# Altium PCB Hammond 1554H Template.PcbDoc
Units mil, origin at the board's own origin, x right, y up, seen from the top; angles counter-clockwise.
Board outline 6580.35 x 4200 mil, 2 copper layers (Top Layer, Bottom Layer); 45 components, 43 nets, 251 pads, 24 vias.
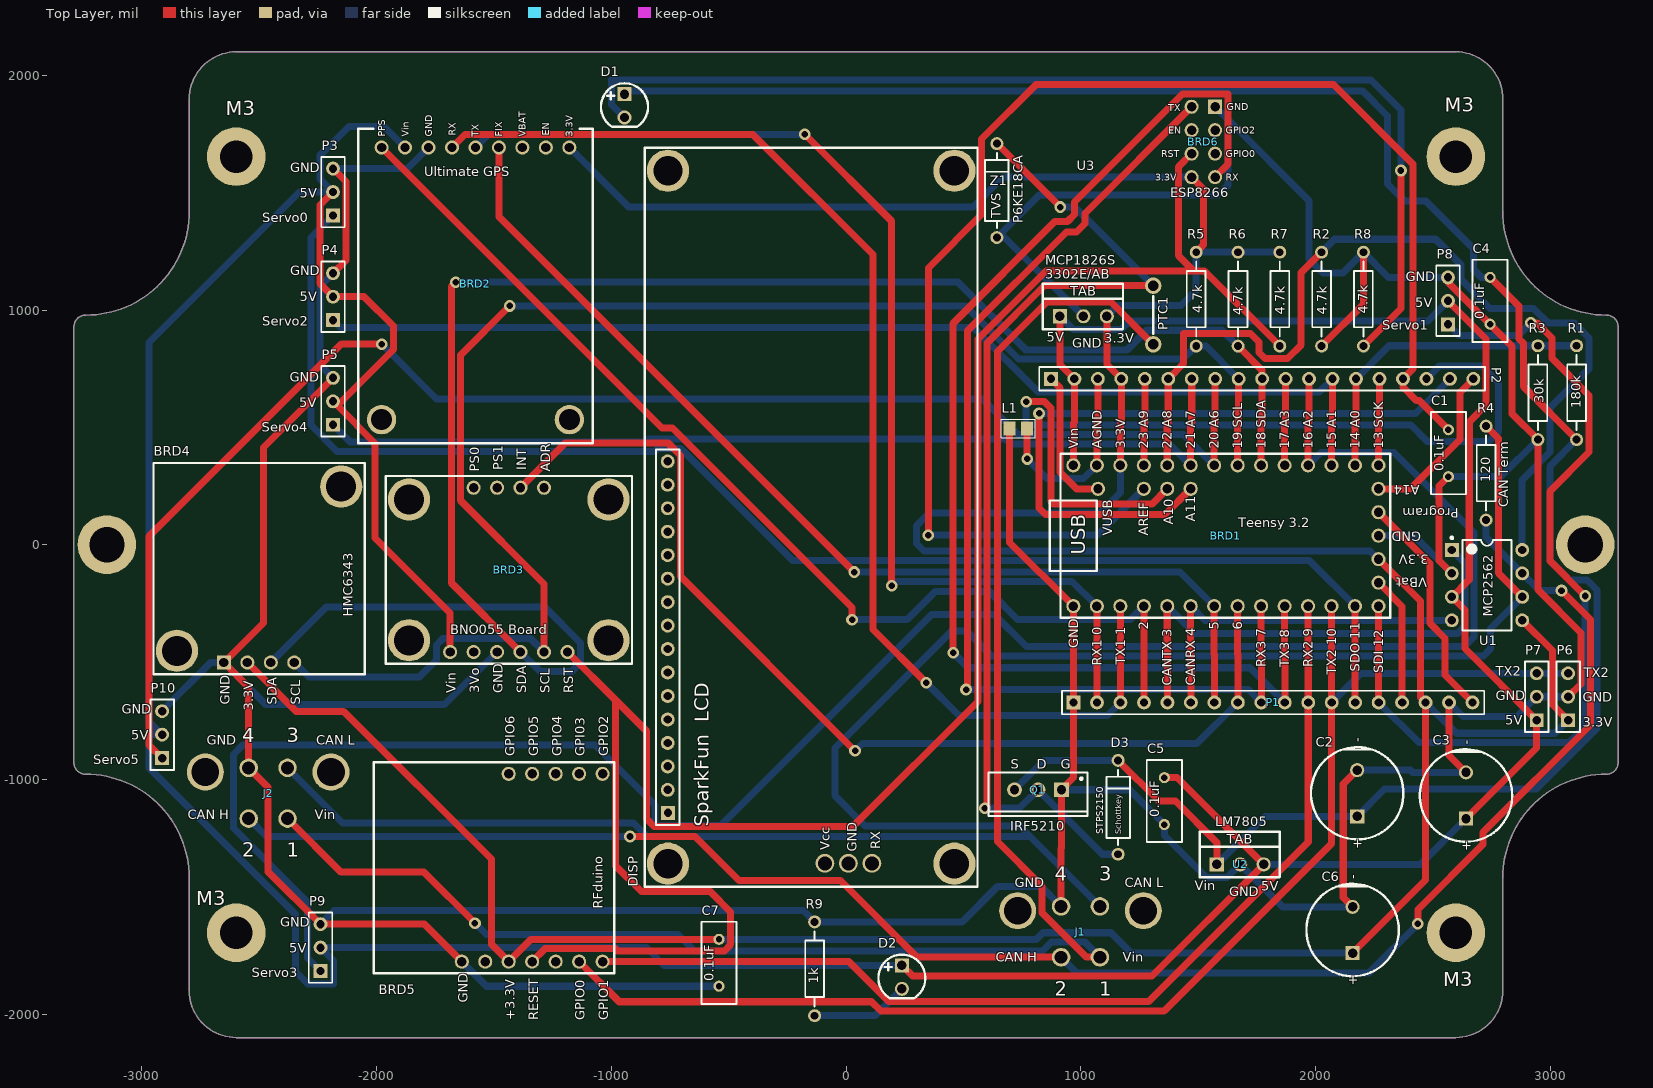
[diagram p0: Top Layer view]
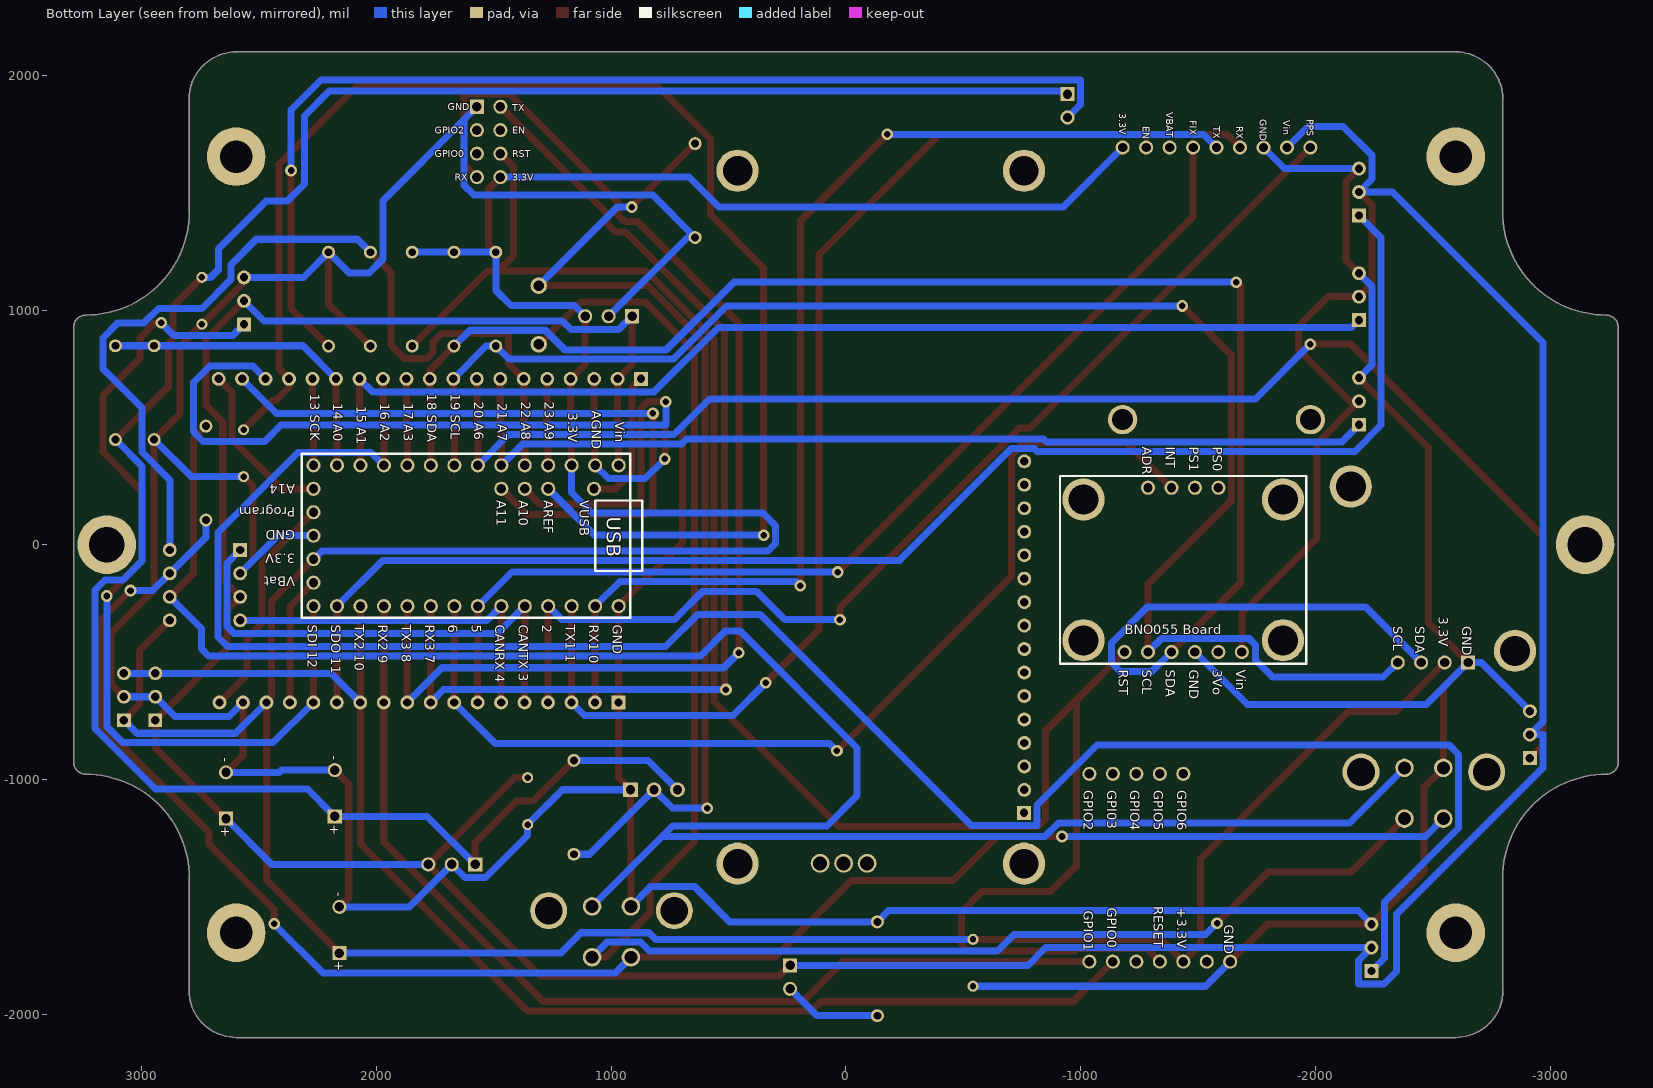
[diagram p1: Bottom Layer view, seen from below]

## Layer stack, top to bottom
Top Solder: solder mask 0.4, Solder Resist, Dk 3.5
Top Layer: signal copper 1.4
Dielectric 1: dielectric 12.6, FR-4, Dk 4.8
Bottom Layer: signal copper 1.4
Bottom Solder: solder mask 0.4, Solder Resist, Dk 3.5

## Board outline
-3240.35,-978.31 cw(c-3240.35,-928.31) -3290.35,-928.31 -3290,-928.31 -3290,928.31 cw(c-3240,928.31) -3240,978.31 ccw(c-3240,1420) -2798.31,1420 -2798.31,1900 -2798.43,1900 cw(c-2598.43,1900) -2598.43,2100 2598.43,2100 cw(c2598.43,1900) 2798.43,1900 2798.31,1900 2798.31,1420 ccw(c3240,1420) 3240,978.31 cw(c3240,928.31) 3290,928.31 3290,-928.31 cw(c3240,-928.31) 3240,-978.31 ccw(c3240,-1420) 2798.31,-1420 2798.31,-1900 2798.43,-1900 cw(c2598.43,-1900) 2598.43,-2100 -2598.78,-2100 cw(c-2598.78,-1900) -2798.78,-1900 -2798.66,-1900 -2798.66,-1420 ccw(c-3240.35,-1420)

## Design rules (kind name [scope] priority, off if disabled: settings)
Clearance [All] p1: gap=10
HoleSize [All] p1: absolutevalues=TRUE maxlimit=250 minlimit=1 maxpercent=80.000 minpercent=20.000
PolygonConnect [All] p1: connectstyle=Relief reliefconductorwidth=10 reliefentries=4 polygonreliefangle="90 Angle" airgapwidth=10
RoomDefinition "Teensy Troller" [InComponentClass('Teensy Troller')] p1: confinementstyle=ConfineIn formatcopy=TRUE lockcomponents=FALSE outline -4418.43,-3668.54 -2418.43,-3668.54 -2418.43,-2668.54 -4418.43,-2668.54
RoutingVias [All] p1: holewidth=28 width=50 viastyle="Through Hole" minholewidth=28 minwidth=50 maxholewidth=28 maxwidth=50
SilkToSilkClearance [All] p1: silktosilkclearance=1
SolderMaskExpansion [All] p1: expansion=4
Width [All] p1: maxlimit=50 minlimit=20 preferedwidth=30
28 further rules are at their usual default settings.

## Components (designator, comment, footprint, x,y, rotation, side; value= is the part's Value field where it differs from the comment)
BRD1 "Teensy 3.2" Teensy 2268.7,-261.81 r90 top
BRD2 "Adafruit Ultimate GPS" GPS -1179.13,1772.64 r90 top
BRD3 "BNO055 IMU" "BNO055 Board" -1437.01,-107.28 r0 top
BRD4 "HMC6343 Compass" HMC6343 -2051.18,-552.17 r90 top
BRD5 "RFD22102" "Simblee RFduino Adapter" -1037.4,-1776.57 r90 top
BRD6 "ESP8266" ESP8266 1472.44,1866.14 r0 top
C1 "0.1uF" RAD-0.2 2566.93,389.76 r90 top
C2 "330uF" "Elec. Cap 5 x 10mm" 2178.15,-1157.48 r90 top
C3 "330uF" "Elec. Cap 5 x 10mm" 2641.73,-1167.32 r90 top
C4 "0.1uF" RAD-0.2 2744.09,1039.37 r90 top
C5 "0.1uF" RAD-0.2 1356.3,-1092.52 r90 top
C6 "330uF" "Elec. Cap 5 x 10mm" 2158.46,-1740.16 r90 top
C7 "0.1uF" RAD-0.2 -541.34,-1781.5 r90 top
D1 "Green" "5mm Rad LED" -942.91,1868.11 r0 top
D2 "Red" "5mm Rad LED" 239.17,-1844.49 r0 top
D3 "RK 16V1" DIODE-0.4 1159.45,-1119.09 r90 top
DISP "Comment" "SparkFun LCD" 560.04,-1457.68 r90 top
J1 "4 Pos Mini-Fit Jr." "4 POS Vertical MINI-FIT JR" 999.02,-1541.34 r0 top
J2 "4 Pos Mini-Fit Jr." "4 POS Vertical MINI-FIT JR" -2462.6,-950.79 r0 top
L1 "80 Ohms" 0805 732.28,495.08 r0 top
P1 "DNP" HDR1X18 969.49,-672.24 r0 top
P2 "DNP" HDR1X19 873.03,706.69 r0 top
P3 "DNP" HDR1X3 -2186.02,1402.56 r90 top
P4 "DNP" HDR1X3 -2186.02,956.69 r90 top
P5 "DNP" HDR1X3 -2186.02,510.83 r90 top
P6 "DNP" HDR1X3 3076.77,-748.03 r90 top
P7 "DNP" HDR1X3 2942.91,-748.03 r90 top
P8 "DNP" HDR1X3 2564.96,938.98 r90 top
P9 "DNP" HDR1X3 -2239.17,-1816.93 r90 top
P10 "DNP" HDR1X3 -2914.37,-909.45 r90 top
PTC1 "0.9 Amp POLYFUSE" PTC 1309.06,978.7 r90 top
Q1 "IRF5210" TO-220AB 817.91,-1044.29 r180 top
R1 "180k" Axial-0.4 3113.19,647.64 r90 top
R2 "4.7k" Axial-0.4 2026.47,1046.26 r90 top
R3 "30k" Axial-0.4 2947.83,647.64 r90 top
R4 "120" Axial-0.4 2727.36,305.12 r90 top
R5 "4.7k" Axial-0.4 1492.11,1046.26 r90 top
R6 "4.7k" Axial-0.4 1670.23,1046.26 r90 top
R7 "4.7k" Axial-0.4 1848.35,1046.26 r90 top
R8 "4.7k" Axial-0.4 2204.6,1046.26 r90 top
R9 "1k" Axial-0.4 -133.86,-1807.09 r90 top
U1 "MCP2562" PDIP300-P8 2731.3,-172.24 r0 top
U2 "OKI-78SR" 78xx 1579.72,-1362.2 r0 top
U3 "MCP1826S" 78xx 911.42,973.43 r0 top
Z1 "SMA6J" DIODE-0.4 642.72,1508.86 r90 top

## Footprints (in the part's own frame and the unit in brackets; to place one, negate y for a bottom-side part, rotate by r counter-clockwise, add the part's x,y. Pads: shape width x height; smd on the part's side, far side on the other; paste and mask are expansions set on the pad)
"4 POS Vertical MINI-FIT JR" [mm] "Vertical Header"
  round 4 hole 3: 0(-6.8,-0.46) 0(6.8,-0.46)
  round 2 hole 1.4: 1(2.1,-5.5) 2(-2.1,-5.5) 3(2.1,0) 4(-2.1,0)
"5mm Rad LED" [mil]
  rect 60x60 hole 40: 1(-1.11,52.05)
  round 60 hole 40: 2(-1.11,-47.95)
  silkscreen extent -101,-88 99,98
78xx [mil] "Voltage regulator based on LM7805"
  rect 60x60 hole 40: 1(0,0)
  round 60 hole 40: 2(100,0) 3(200,0)
  silkscreen extent -73,-55 269,139
0805 [mm]
  rect 1.3x1.5 smd: 1(-0.899,0) 2(1.001,0)
  silkscreen extent -1.8,-1.02 1.9,1.02
Axial-0.4 [mm] "Axial Device, Thru-Hole; 2 Leads; 0.4 in Pin Spacing"
  round 1.4 hole 0.85: 1(-5.08,0) 2(5.08,0)
  silkscreen extent -4.06,-1.02 4.06,1.02
"BNO055 Board" [mil] "Adafruit Breakout Board for the BOSCH Sensortec BNO055"
  round 180 hole 128: 0(-425,-300) 0(-425,300) 0(425,-300) 0(425,300)
  round 60 hole 40: 1(-250,-350) 2(-150,-350) 3(-50,-350) 4(50,-350) 5(150,-350) 6(250,-350) 7(-150,350) 8(-50,350) 9(50,350) 10(150,350)
  silkscreen extent -525,-400 525,400
DIODE-0.4 [mm] "Diode, Thru-Hole; 2 Leads; 0.4 in Pin Spacing"
  round 1.4 hole 0.85: 1(-5.08,0) 2(5.08,0)
  silkscreen extent -4.06,-1.27 4.06,1.27
"Elec. Cap 5 x 10mm" [mil] "2 lead polarized Radial Capacitor with 5 mm lead spacing and 10 mm diameter can"
  rect 60x60 hole 40: 1(0,0)
  round 60 hole 40: 2(196.85,0)
  silkscreen extent -98,-197 295,197
ESP8266 [mil] "WiFi Module - ESP8266 Sparkfun"
  rect 60x60 hole 40: 1(100,0)
  round 60 hole 40: 2(0,0) 3(100,-100) 4(0,-100) 5(100,-200) 6(0,-200) 7(100,-300) 8(0,-300)
GPS [mil] "Adafruit Ultimate GPS Breakout"
  round 125 hole 90: 0(-1240,0) 0(-1240,800)
  round 60 hole 40: 1(-80,0) 2(-80,100) 3(-80,200) 4(-80,300) 5(-80,400) 6(-80,500) 7(-80,600) 8(-80,700) 9(-80,800)
  silkscreen extent -1340,-100 0,900
HDR1X3 [mm] "Connector; Header; 3 Position"
  rect 1.5x1.5 hole 0.9: 1(0,0)
  round 1.5 hole 0.9: 2(2.54,0) 3(5.08,0)
  silkscreen extent -1.27,-1.27 6.35,1.27
HDR1X18 [mm] "Connector; Header; 18 Position"
  rect 1.5x1.5 hole 0.9: 1(0,0)
  round 1.5 hole 0.9: 2(2.54,0) 3(5.08,0) 4(7.62,0) 5(10.16,0) 6(12.7,0) 7(15.24,0) 8(17.78,0) 9(20.32,0) 10(22.86,0) 11(25.4,0) 12(27.94,0) 13(30.48,0) 14(33.02,0) 15(35.56,0) 16(38.1,0) 17(40.64,0) 18(43.18,0)
  silkscreen extent -1.27,-1.27 44.45,1.27
HDR1X19 [mm] "Connector; Header; 19 Position"
  rect 1.5x1.5 hole 0.9: 1(0,0)
  round 1.5 hole 0.9: 2(2.54,0) 3(5.08,0) 4(7.62,0) 5(10.16,0) 6(12.7,0) 7(15.24,0) 8(17.78,0) 9(20.32,0) 10(22.86,0) 11(25.4,0) 12(27.94,0) 13(30.48,0) 14(33.02,0) 15(35.56,0) 16(38.1,0) 17(40.64,0) 18(43.18,0) 19(45.72,0)
  silkscreen extent -1.27,-1.27 46.99,1.27
HMC6343 [mil] "SparkFun HMC6343 Breakout  SEN-12916"
  round 180 hole 128: 0(100,800) 0(800,100)
  rect 60x60 hole 40: 1(50,600)
  round 60 hole 40: 2(50,500) 3(50,400) 4(50,300)
  silkscreen extent 0,0 900,900
PDIP300-P8 [mm] "DIP, 8-Leads, Row Spacing 7.62mm, Pitch 2.54mm, Body 9.5x6.6mm"
  rect 1.5x1.5 hole 0.9: 1(-3.81,3.81)
  round 1.5 hole 0.9: 2(-3.81,1.27) 3(-3.81,-1.27) 4(-3.81,-3.81) 5(3.81,-3.81) 6(3.81,-1.27) 7(3.81,1.27) 8(3.81,3.81)
  silkscreen extent -3.93,-4.9 2.65,5.23, body extent -3.55,-4.9 3.55,4.9, height 4.32
PTC [mil] "TE RGEF600-2"
  round 70 hole 45: 1(-125,0) 2(125,0)
  silkscreen extent -80,0 80,0
RAD-0.2 [mm] "Radial Cap, Thru-Hole; 2 Leads; 0.2 in Pin Spacing"
  round 1.2 hole 0.7: 1(-2.54,0) 2(2.54,0)
  silkscreen extent -4.44,-1.9 4.45,1.91
"Simblee RFduino Adapter" [mil] "Bluetooth / 802.15.1 Development Tools RFduino BLE 4.0 DIP (Arduino-Compatible)"
  round 60 hole 40: 1(0,0) 2(0,100) 3(0,200) 4(0,300) 5(0,400) 6(0,500) 7(0,600) 8(800,0) 9(800,100) 10(800,200) 11(800,300) 12(800,400)
  silkscreen extent -50,-50 850,975
"SparkFun LCD" [mm] "SparkFun LCD with Backlight"
  round 4.572 hole 3.175: 0(2.5,33.5) 0(2.5,2.5) 0(77.5,2.5) 0(77.5,33.5)
  rect 1.5x1.5 hole 0.9: 1(8,33.5)
  round 1.5 hole 0.9: 2(10.488,33.526) 3(13.028,33.526) 4(15.568,33.526) 5(18.108,33.526) 6(20.648,33.526) 7(23.188,33.526) 8(25.728,33.526) 9(28.268,33.526) 10(30.808,33.526) 11(33.348,33.526) 12(35.888,33.526) 13(38.428,33.526) 14(40.968,33.526) 15(43.508,33.526) 16(46.048,33.526)
  round 2.032 hole 1.524: GND(2.54,13.97) RX(2.54,11.43) VCC(2.54,16.51)
  silkscreen extent 0,0 80,36
Teensy [mil] "32 bit Arduino Compatible Microcontroller www.pjrc.com/teensy"
  round 60 hole 40: 1(0,0) 2(0,100) 3(0,200) 4(0,300) 5(0,400) 6(0,500) 7(0,600) 8(0,700) 9(0,800) 10(0,900) 11(0,1000) 12(0,1100) 13(0,1200) 14(0,1300) 15(100,0) 16(200,0) 17(300,0) 18(400,0) 19(500,0) 20(600,0) 21(600,100) 22(600,200) 23(600,300) 24(600,400) 25(600,500) 26(600,600) 27(600,700) 28(600,800) 29(600,900) 30(600,1000) 31(600,1100) 32(600,1200) 33(600,1300) 34(500,1195) 35(500,1000) 36(500,900) 37(500,800)
  silkscreen extent -50,-50 650,1400
TO-220AB [mm] "TO, Thru-Hole, Vertical, Heatsink Mounted; 3 In-Line Leads; Pitch 2.54 mm"
  rect 1.6x1.6 hole 1: 1(-2.54,0)
  round 1.6 hole 1: 2(0,0) 3(2.54,0)
  silkscreen extent -5.35,-1.85 5.35,2.85, body extent -5.4,-1.9 5.4,2.9, height 19.3

## Part data
BRD1: library part Teensy, "32 Bit Arduino-Compatible Microcontroller"
BRD2: library part "GPS - Adafruit"
BRD3: library part "BNO055 Board", "Adafruit BNO055 Sensor Breakout Board"
BRD4: library part HMC6343, "SparkFun HMC6343 Breakout  SEN-12916"
BRD5: library part "Simblee Adapter", "Bluetooth / 802.15.1 Development Tools RFduino BLE 4.0 DIP (Arduino-Compatible)"
BRD6: "Sparkfun ESP8266 Module (WRL-13678)"
C1 C4 C5 C7: library part Cap, "CAP CER 0.1UF 50V 10% X7R 0603"
C2 C3 C6: library part "SMD Elec", "CAP ALUM 330UF 20% 50V RADIAL"
D1: library part "LED - Green", "LED GREEN DIFFUSED 0805 SMD"
D2: library part "LED - SMD", "LED RED DIFFUSED 0805 SMD"
D3: library part "Schottky Diode", "DIODE SCHOTTKY 60V 2A AXIAL"
J1 J2: library part "4 Pos Header Vert", "CONN HEADER 4POS 4.2MM VERT TIN"
L1: library part "Ferrite Bead", "Ferrite Bead 80ohms 100MHz 5A Monolithic 0805 SMD"
P1: library part "Header 18", "Header, 18-Pin"
P2: library part "Header 19", "Header, 19-Pin"
P3 P4 P5 P6 P7 P8 P9 P10: library part "Header 3", "Header, 3-Pin"
PTC1: library part PTC, "Resettable Fuses - PPTC 60V POLYFUSE .900A RADIAL LEADS"
Q1: "MOSFET P-CH 100V 40A TO-220AB"
R1 R3 R4 R8 R9: library part "Chip Resistor", "RES SMD 1K OHM 1% 1/10W 0603"
R2 R5 R6 R7: library part "Chip Resistor", "RES SMD 4.7K OHM 1% 1/8W 0805"
U1: library part MCP2551-I/P, "High-Speed CAN Transceiver, 8-Pin PDIP, Industrial Temperature"
U2: library part 7805, "5V DC/DC Converter (7805 replacement)"
U3: library part 7805, "LDO Voltage Regulators 1A CMOS LDO Vout 3.3V ETR"
Z1: library part "Zener - Bidirectional", "TVS DIODE 15VWM 24.4VC SMA"

## Free pads (board coordinates)
  round 250 hole 150: 0(-3149.61,0) 0(3149.61,0)
  round 250 hole 137.8: 0(-2598.43,-1653.54) 0(-2598.43,1653.54) 0(2598.42,-1653.54) 0(2598.42,1653.54)

## Via types
v1: diameter 50, hole 28, Top Layer to Bottom Layer, 24 vias

## Nets (pads, with @x,y where several pads share a name; then routed paths per layer and width w, separated by ;. In a path a pad name is that pad's centre, name@x,y a point inside that pad or via, vN(x,y) a via of type N, cw(c..) or ccw(c..) an arc to the next point about the centre after c; other vN are vias at no path point)
3V3: BRD1.16 BRD1.31 BRD2.1 BRD4.2 BRD5.5 BRD6.8 C6.1 C7.2 P1.16 P2.4 P6.1 R5.2 R6.2 R7.2 U1.5 U3.3 | length 16504.5
  Top Layer w30: BRD4.2 -2342.8,-710.54 -2140.43,-710.54 -1511.43,-1339.54 -1511.43,-1702.55 BRD5.5 -1342.32,-1681.5 C7.2 ; U3.3 1111.42,768.31 P2.4 1173.03,523.79 1168.7,519.46 BRD1.31 ; BRD6.8 1522.28,1516.31 1522.28,1276.42 R5.2 ; C6.1 2469.49,-1429.13 P1.16 2447.57,-650.33 2447.57,-240.69 BRD1.16 ; U1.5 3009.57,-450.52 3009.57,-680.84 P6.1
  Bottom Layer w30: BRD2.1 -925.95,1439.46 541.57,1439.46 668.26,1566.14 BRD6.8 ; C7.2 811.97,-1681.5 839.96,-1653.5 1128.53,-1653.5 1215.19,-1740.16 C6.1 ; U3.3 1156.42,1018.43 1426.58,1018.43 1492.11,1083.96 R5.2 R6.2 R7.2 ; BRD1.31 1168.7,221.58 1081.57,134.46 353.57,134.46 299.57,80.46 299.57,5.46 331.57,-26.54 2233.43,-26.54 BRD1.16 ; P1.16 2600.79,-803.54 3021.26,-803.54 P6.1
5V0: BRD1.33 BRD2.8 BRD3.1 C3.1 C5.2 D2.1 P2.2 P3.2 P4.2 P5.2 P7.1 P8.2 P9.2 P10.2 U1.3 U2.3 U3.1 | length 18355.1
  Top Layer w30: P5.2 P5.2@-2167.54,592.34 ; P3.2 -2241.43,1447.16 -2241.43,1112.09 P4.2 -2053.66,1056.69 -1928.43,931.46 -1928.43,831.46 P5.2@-2167.54,592.34 ; BRD3.1 -1687.01,-291.54 -2006.43,27.87 -2006.43,431.23 P5.2@-2167.54,592.34 ; D2.1 284.17,-1838.54 1303.39,-1838.54 U2.3 1410.04,-992.52 C5.2 ; U3.1 911.42,768.31 P2.2 973.03,523.79 968.7,519.46 BRD1.33 ; P8.2 2727.57,876.36 2727.57,595.46 2655.55,523.43 2655.55,-147.99 U1.3 2637.57,-278.52 2637.57,-442.69 P7.1 2942.91,-866.14 C3.1
  Bottom Layer w30: BRD2.8 -1968.95,1782.46 -2118.43,1782.46 -2241.43,1659.46 -2241.43,1557.96 P3.2 -2328.32,1502.56 -2969.43,861.46 -2969.43,-754.39 P10.2 -2969.43,-809.45 -2969.43,-950.54 -2345.43,-1574.54 -2345.43,-1818.54 -2292.43,-1871.54 -2184.43,-1871.54 -2184.43,-1771.68 P9.2 -851.04,-1716.93 -775.54,-1792.43 D2.1 ; U3.1 968.38,916.46 1171.81,916.46 1209.05,953.7 2479.68,953.7 P8.2 ; U2.3 2446.85,-1362.21 C3.1
12V0: C2.1 C4.2 D1.1 D3.2 Q1.3 R1.1 U2.1 | length 9506.1
  Top Layer w30: D3.2 1332.9,-1092.54 1403.72,-1092.54 1579.72,-1268.54 U2.1 ; C4.2 2867.34,1016.13 2867.34,876.88 2887.57,856.64 2887.57,673.25 R1.1
  Bottom Layer w30: D1.1 -931.73,1932.46 2201.57,1932.46 2307.57,1826.46 2307.57,1537.11 2381.14,1463.54 2470.49,1463.54 2674.57,1259.46 2674.57,1171.37 2706.57,1139.37 C4.2 ; Q1.3 843.11,-919.1 D3.2 ; U2.1 1784.45,-1157.48 C2.1 2294.09,-1041.54 2942.57,-1041.54 3200.57,-783.54 3200.57,-193.54 3157.03,-150 3081.03,-150 2999.57,-68.54 2999.57,334.02 R1.1
CAN1H: J1.2 J2.2 R4.1 U1.7 | length 7604.8
  Top Layer w30: v1(-920.43,-1243.54) -643.43,-1243.54 -455.43,-1431.54 -23.43,-1431.54 302.9,-1757.87 J1.2 ; v1(2436.57,-1615.54) 2436.57,-1554.54 2714.57,-1276.54 2714.57,-1225.54 3171.57,-768.54 3171.57,-318.54 v1(3048.57,-195.54)
  Bottom Layer w30: J2.2 -2469.06,-1243.54 v1(-920.43,-1243.54) ; J1.2 983.01,-1824.54 2227.57,-1824.54 v1(2436.57,-1615.54) ; R4.1 2727.36,31.69 U1.7 2954.6,-195.54 v1(3048.57,-195.54)
CAN1L: J1.3 J2.3 R4.2 U1.6 | length 8937.9
  Top Layer w30: R4.2 2780.57,451.91 2780.57,-121.52 U1.6
  Bottom Layer w30: J2.3 -2145.17,-1185.54 -905.09,-1185.54 -847.09,-1243.54 783.9,-1243.54 ; J1.3 783.9,-1243.54 ; U1.6 2746.57,-356.97 2746.57,-443.54 2715.57,-474.54 620.5,-474.54 514.5,-368.54 450.5,-368.54 -47.43,-866.47 -47.43,-1069.54 81.57,-1198.54 738.9,-1198.54 783.9,-1243.54
GND: BRD1.14 BRD1.17 BRD2.7 BRD3.3 BRD4.1 BRD5.7 BRD6.1 C1.1 C2.2 C3.2 C4.1 C5.1 C6.2 C7.1 J1.4 J2.4 L1.1 P1.1 P1.17 P3.3 P4.3 P5.3 P6.2 P7.2 P8.3 P9.3 P10.3 Q1.1 R2.1 R3.1 R8.2 R9.2 U1.2 U2.2 U3.2 Z1.1 | length 23751.5
  Top Layer w30: P5.3 -2482.43,414.42 -2482.43,-333.41 BRD4.1 -2545.28,-608.07 J2.4 -2462.43,-1033.64 -2462.43,-1393.68 P9.3 -1797.05,-1616.93 BRD5.7 ; P4.3 -2131.43,1211.29 -2131.43,1547.96 P3.3 ; L1.1 696.88,10.01 BRD1.14 968.7,-466.76 969.49,-467.54 P1.1 969.49,-992.72 Q1.1 917.91,-1292.97 916.34,-1294.54 J1.4 ; R2.1 2204.59,1024.38 R8.2 ; C6.2 2118.57,-1503.42 2118.57,-1020.2 C2.2 ; P8.3 2564.96,1118.5 C4.1 2838.57,844.89 2838.57,556.9 R3.1 2947.83,-191.84 3131.57,-375.58 3131.57,-593.23 P6.2 ; C1.1 2526.57,249.41 2526.57,-67.52 U1.2 ; P1.17 2569.49,-898.23 C3.2
  Bottom Layer w30: P10.3 -2707.09,-502.17 BRD4.1 -2472.8,-680.54 -1710.27,-680.54 BRD3.3 ; P9.3 -2181.78,-1559.53 -181.42,-1559.53 R9.2 495.03,-1607.09 646.57,-1455.54 830.54,-1455.54 J1.4 ; P5.3 -2240.55,765.35 -2240.55,1102.16 P4.3 ; P3.3 -1869.21,1602.56 BRD2.7 ; BRD5.7 -1532.48,-1881.5 C7.1 ; Q1.1 1208.07,-1044.29 C5.1 1356.3,-1238.83 1536.01,-1418.54 1623.39,-1418.54 U2.2 1860.83,-1543.31 C6.2 ; U3.2 675.98,1308.86 Z1.1 823.15,1489.29 1585.41,1489.29 1627.57,1531.46 1627.57,1811.01 ; BRD6.1 1627.57,1811.01 ; C2.2 2404.57,-960.63 2414.42,-970.47 C3.2 ; BRD1.17 2420.87,38.19 U1.2 ; P8.3 2311.88,1138.98 R8.2 2116.79,1158.46 2031.57,1158.46 1973.57,1216.46 1973.57,1465.01 1627.57,1811.01 ; C1.1 2789.96,289.76 R3.1 ; P1.17 2628.79,-731.54 2859.4,-731.54 P7.2 P6.2
NetBRD1_1: BRD1.1 P1.14 P8.1 | length 3756.7
  Top Layer w30: BRD1.1 2268.7,-466.76 2269.49,-467.54 P1.14 ; v1(2917.57,945.46) 2944.57,945.46 3008.57,881.46 3008.57,794.46 3166.57,636.46 3166.57,394.46 2999.61,227.49 2999.61,-68.54 v1(3149.57,-218.51)
  Bottom Layer w30: P1.14 2440.79,-843.54 3081.57,-843.54 3149.57,-775.54 v1(3149.57,-218.51) ; P8.1 2613.48,890.46 2862.57,890.46 v1(2917.57,945.46)
NetBRD1_2: BRD1.2 P1.13 P3.1 | length 6121.9
  Top Layer w30: BRD1.2 2168.7,-466.76 2169.49,-467.54 P1.13
  Bottom Layer w30: P3.1 -2280.55,1308.03 -2280.55,509.58 -2168.43,397.46 -814.43,397.46 -802.12,409.76 -704.43,409.76 -228.12,-66.54 1973.43,-66.54 BRD1.2
NetBRD1_3: BRD1.3 BRD5.2 P1.12 P6.3 P7.3 | length 5660.8
  Top Layer w30: BRD5.2 -966.43,-1947.54 108.4,-1947.54 148.29,-1987.43 1355.68,-1987.43 2069.49,-1273.63 P1.12 2069.49,-467.54 2068.7,-466.76 BRD1.3
  Bottom Layer w30: P1.12 2193.7,-548.03 P7.3 P6.3
NetBRD1_4: BRD1.4 BRD5.1 P1.11 | length 4364.8
  Top Layer w30: BRD5.1 11.72,-1776.58 182.57,-1947.43 1288.68,-1947.43 1969.49,-1266.63 P1.11 1969.49,-467.54 1968.7,-466.76 BRD1.4
NetBRD1_5: BRD1.5 BRD6.7 P1.10 | length 5300.3
  Top Layer w30: v1(456.57,-460.47) 456.57,943.46 891.17,1378.05 944.46,1378.05 972.87,1406.46 972.87,1459.75 1434.26,1921.14 1627.57,1921.14 1627.57,1621.28 BRD6.7 ; BRD1.5 1868.7,-466.76 1869.49,-467.54 P1.10
  Bottom Layer w30: v1(456.57,-460.47) 520.52,-524.42 1721.66,-524.42 P1.10
NetBRD1_6: BRD1.6 BRD6.2 P1.9 | length 4597.7
  Top Layer w30: v1(511.57,-617.54) 516.57,-612.54 516.57,910.28 939.44,1333.14 981.57,1333.14 1017.78,1369.34 1017.78,1411.48 BRD6.2 ; BRD1.6 1768.7,-466.76 1769.49,-467.54 P1.9
  Bottom Layer w30: v1(511.57,-617.54) 1714.79,-617.54 P1.9
NetBRD1_7: BRD1.7 BRD3.9 P1.8 | length 4476
  Top Layer w30: BRD3.9 -1197.27,432.46 -757.43,432.46 -705.35,380.38 -705.35,-134.65 v1(38.54,-878.54) ; BRD1.7 1668.7,-466.76 1669.49,-467.54 P1.8
  Bottom Layer w30: v1(38.54,-878.54) 69.54,-847.54 1494.19,-847.54 P1.8
NetBRD1_8: BRD1.8 BRD2.4 P1.7 | length 4441.1
  Top Layer w30: BRD2.4 -1479.13,1397.41 v1(34.82,-116.54) ; BRD1.8 1568.7,-466.76 1569.49,-467.54 P1.7
  Bottom Layer w30: v1(34.82,-116.54) 1423.43,-116.54 BRD1.8
NetBRD1_9: BRD1.9 P1.6 U1.4 | length 1548.4
  Top Layer w30: BRD1.9 1468.7,-466.76 1469.49,-467.54 P1.6
  Bottom Layer w30: BRD1.9 1529.13,-322.24 U1.4
NetBRD1_10: BRD1.10 P1.5 U1.1 | length 2088.6
  Top Layer w30: BRD1.10 1368.7,-466.76 1369.49,-467.54 P1.5
  Bottom Layer w30: BRD1.10 1485.43,-378.54 2606.57,-378.54 2636.57,-348.54 2636.57,-77.52 U1.1
NetBRD1_11: BRD1.11 BRD2.9 P1.4 | length 4646.4
  Top Layer w30: BRD2.9 -783.87,497.38 -739.77,497.38 25.57,-267.96 v1(25.57,-319.54) ; BRD1.11 1268.7,-466.76 1269.49,-467.54 P1.4
  Bottom Layer w30: v1(25.57,-319.54) 260.64,-319.54 381.57,-198.61 610.14,-198.61 731.07,-319.54 1210.97,-319.54 BRD1.11
NetBRD1_12: BRD1.12 BRD2.6 P1.3 | length 5267.1
  Top Layer w30: BRD2.6 -1623.32,1748.46 -397.43,1748.46 114.57,1236.46 114.57,-361.54 v1(341.57,-588.54) ; BRD1.12 1168.7,-466.76 1169.49,-467.54 P1.3
  Bottom Layer w30: v1(341.57,-588.54) 480.57,-727.54 1114.19,-727.54 P1.3
NetBRD1_13: BRD1.13 BRD2.5 P1.2 | length 4839
  Top Layer w30: v1(-175.43,1748.46) 194.57,1378.46 v1(194.57,-174.54) ; BRD1.13 1068.7,-466.76 1069.49,-467.54 P1.2
  Bottom Layer w30: BRD2.5 -1523.32,1748.46 v1(-175.43,1748.46) ; v1(194.57,-174.54) 212.57,-156.54 963.43,-156.54 BRD1.13
NetBRD1_15: BRD1.15 P1.15 | length 552.2
  Top Layer w30: BRD1.15 2369.49,-262.6 P1.15
NetBRD1_18: BRD1.18 P1.18 | length 976.4
  Top Layer w30: BRD1.18 2487.57,-80.69 2487.57,-334.54 2552.57,-399.54 2552.57,-555.33 P1.18
NetBRD1_19: BRD1.19 P2.19 | length 716
  Top Layer w30: BRD1.19 2405.31,238.19 2615.55,448.43 2615.55,649.21 P2.19
NetBRD1_20: BRD1.20 P2.15 | length 370.3
  Top Layer w30: BRD1.20 2268.7,519.46 2273.03,523.79 P2.15
NetBRD1_21: BRD1.21 P2.14 R1.2 R3.2 | length 1368.8
  Top Layer w30: BRD1.21 2168.7,519.46 2173.03,523.79 P2.14
  Bottom Layer w30: P2.14 2313.98,847.64 R3.2 R1.2
NetBRD1_22: BRD1.22 P2.13 P4.1 | length 4778.7
  Top Layer w30: BRD1.22 2068.7,519.46 2073.03,523.79 P2.13
  Bottom Layer w30: P4.1 -2154.79,925.46 543.57,925.46 817.57,651.46 2017.79,651.46 P2.13
NetBRD1_23: BRD1.23 P2.12 P9.1 | length 8709.4
  Top Layer w30: BRD1.23 1968.7,519.46 1973.03,523.79 P2.12
  Bottom Layer w30: P9.1 -2294.43,-1761.68 -2294.43,-1522.54 -2610.43,-1206.54 -2610.43,-893.54 -2570.43,-853.54 -1069.39,-853.54 -813.39,-1109.54 -813.39,-1197.25 -534.13,-1197.25 366.57,-296.54 630.74,-296.54 768.74,-434.54 2635.57,-434.54 2676.57,-393.54 2676.57,51.46 2334.57,393.46 2023.97,393.46 BRD1.23
NetBRD1_24: BRD1.24 P2.11 | length 370.3
  Top Layer w30: BRD1.24 1868.7,519.46 1873.03,523.79 P2.11
NetBRD1_25: BRD1.25 BRD3.4 BRD4.3 P2.10 R6.1 | length 7644.4
  Top Layer w30: v1(-1663.43,1118.46) -1682.01,1099.87 -1682.01,-162.28 BRD3.4 ; R6.1 1773.03,743.46 P2.10 1773.03,523.79 1768.7,519.46 BRD1.25
  Bottom Layer w30: BRD4.3 -2213.56,-264.54 -1285.43,-264.54 -1131.43,-418.54 -1131.43,-502.54 -1168.43,-539.54 -1304.75,-539.54 BRD3.4 ; v1(-1663.43,1118.46) 477.57,1118.46 765.57,830.46 1198.05,830.46 1281.3,913.7 1602.79,913.7 R6.1
NetBRD1_26: BRD1.26 BRD3.5 BRD4.4 P2.9 R5.1 | length 6578.8
  Top Layer w30: v1(-1433.43,1017.46) -1642.01,808.87 -1642.01,187.46 -1287.01,-167.54 BRD3.5 ; BRD1.26 1668.7,519.46 1673.03,523.79 P2.9
  Bottom Layer w30: BRD4.4 -2288.8,-564.54 -1818.43,-564.54 -1745.43,-491.54 -1745.43,-427.54 -1718.43,-400.54 -1343.75,-400.54 BRD3.5 ; v1(-1433.43,1017.46) 508.57,1017.46 735.57,790.46 1436.31,790.46 R5.1 1533.46,846.26 P2.9
NetBRD1_27: BRD1.27 P2.8 P10.1 | length 6429.4
  Top Layer w30: P10.1 -2969.43,-854.39 -2969.43,35.76 -2150.73,854.46 v1(-1978.43,854.46) ; BRD1.27 1568.7,519.46 1573.03,523.79 P2.8
  Bottom Layer w30: v1(-1978.43,854.46) -1744.43,620.46 581.57,620.46 732.57,469.46 1437.43,469.46 BRD1.27
NetBRD1_28: BRD1.28 P2.7 P5.1 | length 4106.7
  Top Layer w30: BRD1.28 1468.7,519.46 1473.03,523.79 P2.7
  Bottom Layer w30: P5.1 -2112.65,437.46 -854.41,437.46 -842.1,449.76 680.27,449.76 700.57,429.46 1377.43,429.46 BRD1.28
NetBRD1_29: BRD1.29 P2.6 R2.2 U1.8 | length 4012
  Top Layer w30: BRD1.29 1368.7,519.46 1373.03,523.79 P2.6 1438.57,772.24 1438.57,899.46 1723.57,899.46 1759.57,863.46 1759.57,818.46 1784.57,793.46 1881.57,793.46 1939.57,851.46 1939.57,1159.36 R2.2
  Bottom Layer w30: R2.2 2081.67,1301.46 2512.57,1301.46 2619.57,1194.46 2619.57,1131.46 2744.57,1006.46 2929.57,1006.46 2990.57,945.46 3102.57,945.46 3166.57,881.46 3166.57,749.64 3000.39,583.46 3000.39,395.46 2881.3,276.36 U1.8
NetBRD1_30: BRD1.30 P2.5 | length 370.3
  Top Layer w30: BRD1.30 1268.7,519.46 1273.03,523.79 P2.5
NetBRD1_32: BRD1.32 L1.2 P2.3 | length 855.3
  Top Layer w30: v1(771.68,365.35) L1.2 ; BRD1.32 1068.7,519.46 1073.03,523.79 P2.3
  Bottom Layer w30: v1(771.68,365.35) 855.57,281.46 1011.97,281.46 BRD1.32
NetBRD1_34: BRD1.34 P2.1 | length 605.6
  Top Layer w30: P2.1 912.57,667.15 912.57,307.19 981.57,238.19 BRD1.34
NetBRD1_35: BRD1.35 C1.2 P2.16 | length 6093.5
  Top Layer w30: v1(350.57,40.46) 350.57,1179.46 577.57,1406.46 577.57,1728.46 810.26,1961.14 2076.54,1961.14 2414.99,1622.7 2414.99,748.65 P2.16 2373.03,672 2431.57,613.46 2443.24,613.46 C1.2
  Bottom Layer w30: v1(350.57,40.46) 1070.97,40.46 BRD1.35
NetBRD1_36: BRD1.36 P2.17 | length 3770.1
  Top Layer w30: v1(767.57,609.46) 844.57,609.46 872.57,581.46 872.57,183.76 883.87,172.46 1302.97,172.46 BRD1.36
  Bottom Layer w30: v1(767.57,609.46) 767.57,509.46 2407.57,509.46 2476.57,440.46 2739.57,440.46 2780.57,481.46 2780.57,691.46 2710.57,761.46 2527.79,761.46 P2.17
NetBRD1_37: BRD1.37 P2.18 | length 2917.3
  Top Layer w30: v1(822.57,559.46) 822.57,156.46 850.16,128.87 1359.38,128.87 BRD1.37
  Bottom Layer w30: v1(822.57,559.46) 2425.79,559.46 P2.18
NetBRD3_6: BRD3.6 BRD5.4 BRD6.6 R7.1 | length 8428
  Top Layer w30: BRD5.4 -1282.37,-1721.54 -982.43,-1721.54 -973.43,-1730.54 -518.43,-1730.54 -492.43,-1704.54 -492.43,-1564.54 -578.43,-1478.54 -871.43,-1478.54 -981.43,-1368.54 -981.43,-662.87 ; BRD3.6 -981.43,-662.87 ; BRD6.6 1416.57,1610.28 1416.57,1231.46 1481.57,1166.46 ; R7.1 1528.16,1166.46 1481.57,1166.46 ; -981.43,-662.87 -849.43,-794.87 -849.43,-1169.54 -818.43,-1200.54 28.57,-1200.54 561.57,-667.54 561.57,876.29 851.74,1166.46 1481.57,1166.46
NetD1_2: D1.2 R8.1 | length 4672.7
  Top Layer w30: R8.1 2364.57,1006.24 v1(2364.57,1594.46)
  Bottom Layer w30: D1.2 -999.43,1875.57 -999.43,1980.46 2236.57,1980.46 2364.57,1852.46 v1(2364.57,1594.46)
NetD2_2: D2.2 R9.1 | length 419.4
  Bottom Layer w30: R9.1 123.41,-2007.09 D2.2
NetD3_1: D3.1 PTC1.2 Q1.2 Z1.2 | length 4426.1
  Top Layer w30: v1(591.57,-1122.54) 601.57,-1112.54 601.57,859.72 845.56,1103.7 PTC1.2 ; Z1.2 v1(913.12,1438.46)
  Bottom Layer w30: v1(591.57,-1122.54) 739.66,-1122.54 Q1.2 1092.72,-1319.1 D3.1 ; v1(913.12,1438.46) 974.3,1438.46 PTC1.2
RAW: J1.1 J2.1 PTC1.1 | length 7357.3
  Top Layer w30: J2.1 -2151.7,-1395.54 -1798.43,-1395.54 v1(-1581.43,-1612.54) ; J1.1 1024.9,-1757.87 835.57,-1568.54 835.57,-1455.54 645.57,-1265.54 645.57,822.46 856.57,1033.46 1129.3,1033.46 PTC1.1
  Bottom Layer w30: v1(-1581.43,-1612.54) -1532.43,-1661.54 -715.43,-1661.54 -645.43,-1731.54 837.57,-1731.54 875.62,-1693.5 1017.32,-1693.5 J1.1
pads on no net: BRD2.0 BRD2.2 BRD2.3 BRD3.0 BRD3.2 BRD3.7 BRD3.8 BRD3.10 BRD4.0 BRD5.3 BRD5.6 BRD5.8 BRD5.9 BRD5.10 BRD5.11 BRD5.12 BRD6.3 BRD6.4 BRD6.5 DISP.0 DISP.1 DISP.2 DISP.3 DISP.4 DISP.5 DISP.6 DISP.7 DISP.8 DISP.9 DISP.10 DISP.11 DISP.12 DISP.13 DISP.14 DISP.15 DISP.16 DISP.GND DISP.RX DISP.VCC J1.0 J2.0

## Keep-outs
Keep-Out Layer:
  lines w5: -3290.35,-928.31 ccw(c-3240.35,-928.31) -3240.35,-978.31 cw(c-3240.35,-1420) -2798.66,-1420 -2798.66,-1900 ; -3290,928.31 cw(c-3240,928.31) -3240,978.31 ccw(c-3240,1420) -2798.31,1420 -2798.31,1900 ; -3290,-928.31 -3290,928.31 ; -2798.78,-1900 ccw(c-2598.78,-1900) -2598.78,-2100 ; -2798.43,1900 cw(c-2598.43,1900) -2598.43,2100 2598.42,2100 cw(c2598.43,1900) 2798.43,1900 ; -2598.43,-2100 2598.42,-2100 ccw(c2598.43,-1900) 2798.43,-1900 ; 2798.31,-1900 2798.31,-1420 cw(c3240,-1420) 3240,-978.31 ccw(c3240,-928.31) 3290,-928.31 3290,928.31 ccw(c3240,928.31) 3240,978.31 cw(c3240,1420) 2798.31,1420 2798.31,1900

## Silkscreen, mask and mechanical layers (free items; w line width, h text height)
Top Overlay:
  text "M3" at 2551.18,1844.49 h60
  text "M3" at -2643.7,1830.71 h60
  text "GND" at -2368.23,1587.6 h40
  text "Ultimate GPS" at -1798.23,1568.9 h40
  text "5V" at -2328.24,1477.36 h40
  text "TVS" at 659.45,1390.75 h40 r90
  text "Servo0" at -2488.19,1373.03 h40
  text "P6KE18CA" at 751.97,1369.09 h40 r90
  text "GND" at -2368.23,1147.64 h40
  text "MCP1826S / 3302E/AB" at 849.41,1132.87 h40
  text "GND" at 2384.73,1123.03 h40
  text "5V" at -2328.24,1037.4 h40
  text "5V" at 2424.71,1012.8 h40
  text "4.7k" at 1518.7,986.22 h40 r90
  text "4.7k" at 2222.44,983.27 h40 r90
  text "4.7k" at 1869.09,979.33 h40 r90
  text "4.7k" at 2048.23,979.33 h40 r90
  text "4.7k" at 1690.94,977.36 h40 r90
  text "0.1uF" at 2719.49,961.61 h40 r90
  text "Servo2" at -2488.19,933.07 h40
  text "Servo1" at 2285.43,915.35 h40
  text "GND" at -2370.2,694.88 h40
  text "30k" at 2972.44,602.36 h40 r90
  text "5V" at -2330.21,584.65 h40
  text "180k" at 3130.91,581.69 h40 r90
  text "Servo4" at -2490.16,480.31 h40
  text "0.1uF" at 2546.26,313.98 h40 r90
  text "120" at 2746.06,265.75 h40 r90
  text "CAN Term" at 2820.87,159.45 h40 r90
  text "Teensy 3.2" at 1672.24,73.82 h40
  text "MCP2562" at 2755.91,-306.1 h40 r90
  text "TX2" at 2768.7,-559.06 h40
  text "TX2" at 3143.7,-563.98 h40
  text "GND" at 2768.7,-663.39 h40
  text "GND" at 3139.76,-668.31 h40
  text "GND" at -3086.73,-720.47 h40
  text "5V" at 2808.69,-767.72 h40
  text "3.3V" at 3138.78,-776.57 h40
  text "5V" at -3046.74,-830.71 h40
  text "GND" at -2724.41,-853.35 h40
  text "CAN L" at -2256.89,-853.35 h40
  text "Servo5" at -3206.69,-935.04 h40
  text "S" at 701.77,-953.74 h40
  text "D" at 812.99,-953.74 h40
  text "G" at 915.35,-953.74 h40
  text "0.1uF" at 1333.66,-1162.4 h40 r90
  text "CAN H" at -2806.1,-1169.29 h40
  text "Vin" at -2264.76,-1170.28 h40
  text "LM7805" at 1572.83,-1198.82 h40
  text "IRF5210" at 698.82,-1218.5 h40
  text "STPS2150" at 1095.47,-1233.27 h30 r90
  text "Schottkey" at 1173.23,-1233.27 h25 r90
  text "GND" at 719.49,-1460.63 h40
  text "CAN L" at 1187.01,-1460.63 h40
  text "M3" at -2769.68,-1536.42 h60
  text "GND" at -2411.53,-1628.94 h40
  text "5V" at -2371.55,-1739.17 h40
  text "CAN H" at 637.8,-1776.57 h40
  text "Vin" at 1179.13,-1777.56 h40
  text "Servo3" at -2531.5,-1843.5 h40
  text "0.1uF" at -563.98,-1861.22 h40 r90
  text "1k" at -118.11,-1871.06 h40 r90
  text "M3" at 2544.29,-1880.91 h60

## Text inside footprints (layer, text, board x,y; h text height)
BRD1: Top Overlay "A11" at 1488.7,98.17 h40 r90; Top Overlay "A10" at 1393.7,84.84 h40 r90; Top Overlay "AREF" at 1288.7,38.19 h40 r90; Top Overlay "VUSB" at 1133.7,38.19 h40 r90; Top Overlay "Vin" at 988.7,408.19 h40 r90; Top Overlay "AGND" at 1088.7,408.19 h40 r90; Top Overlay "3.3V" at 1188.7,408.19 h40 r90; Top Overlay "23 A9" at 1288.7,408.19 h40 r90; Top Overlay "22 A8" at 1388.7,408.19 h40 r90; Top Overlay "21 A7" at 1488.7,408.19 h40 r90; Top Overlay "20 A6" at 1588.7,408.19 h40 r90; Top Overlay "19 SCL" at 1688.7,408.19 h40 r90; Top Overlay "18 SDA" at 1788.7,408.19 h40 r90; Top Overlay "17 A3" at 1888.7,408.19 h40 r90; Top Overlay "16 A2" at 1988.7,408.19 h40 r90; Top Overlay "15 A1" at 2088.7,408.19 h40 r90; Top Overlay "14 A0" at 2188.7,408.19 h40 r90; Top Overlay "13 SCK" at 2288.7,408.19 h40 r90; Top Overlay "A14" at 2443.71,253.19 h40 r180; Top Overlay "Program" at 2610.33,154.44 h40 r180; Top Overlay "GND" at 2450.38,55.69 h40 r180; Top Overlay "3.3V" at 2483.7,-43.06 h40 r180; Top Overlay "VBat" at 2477.04,-141.81 h40 r180; Top Overlay "SDO 11" at 2188.7,-541.8 h40 r90; Top Overlay "SDI 12" at 2288.7,-548.47 h40 r90; Top Overlay "RX2 9" at 1988.7,-521.81 h40 r90; Top Overlay "TX2 10" at 2088.7,-555.13 h40 r90; Top Overlay "TX3 8" at 1888.7,-521.81 h40 r90; Top Overlay "RX3 7" at 1788.7,-521.81 h40 r90; Top Overlay "6" at 1688.7,-361.86 h40 r90; Top Overlay "5" at 1588.7,-361.86 h40 r90; Top Overlay "CANRX 4" at 1488.7,-601.79 h40 r90; Top Overlay "CANTX 3" at 1388.7,-601.79 h40 r90; Top Overlay "2" at 1288.7,-361.86 h40 r90; Top Overlay "TX1 1" at 1188.7,-511.81 h40 r90; Top Overlay "RX1 0" at 1088.7,-515.15 h40 r90; Top Overlay "GND" at 988.7,-441.84 h40 r90; Top Overlay "USB" at 1018.7,-41.81 h60 r90; Bottom Overlay "USB" at 1018.7,118.19 h60 r90; Bottom Overlay "VUSB" at 1133.7,189.81 h40 r90; Bottom Overlay "AREF" at 1288.7,189.81 h40 r90; Bottom Overlay "A10" at 1393.7,189.81 h40 r90; Bottom Overlay "A11" at 1488.7,189.81 h40 r90; Bottom Overlay "CANTX 3" at 1393.7,-340.2 h40 r90; Bottom Overlay "CANRX 4" at 1493.7,-340.2 h40 r90; Bottom Overlay "GND" at 993.7,-340.2 h40 r90; Bottom Overlay "RX1 0" at 1093.7,-340.2 h40 r90; Bottom Overlay "RX3 7" at 1793.7,-340.2 h40 r90; Bottom Overlay "TX3 8" at 1893.7,-340.2 h40 r90; Bottom Overlay "SDI 12" at 2293.7,-340.2 h40 r90; Bottom Overlay "SDO 11" at 2193.7,-340.2 h40 r90; Bottom Overlay "TX1 1" at 1193.7,-340.2 h40 r90; Bottom Overlay "RX2 9" at 1993.7,-340.2 h40 r90; Bottom Overlay "TX2 10" at 2093.7,-340.2 h40 r90; Bottom Overlay "2" at 1293.7,-340.2 h40 r90; Bottom Overlay "5" at 1593.7,-340.2 h40 r90; Bottom Overlay "6" at 1693.7,-340.2 h40 r90; Bottom Overlay "Program" at 2347.08,159.43 h40 r180; Bottom Overlay "A14" at 2347.08,258.18 h40 r180; Bottom Overlay "VBat" at 2347.08,-136.82 h40 r180; Bottom Overlay "GND" at 2347.08,60.68 h40 r180; Bottom Overlay "3.3V" at 2347.08,-38.07 h40 r180; Bottom Overlay "22 A8" at 1383.7,609.8 h40 r90; Bottom Overlay "20 A6" at 1583.7,609.8 h40 r90; Bottom Overlay "18 SDA" at 1783.7,643.12 h40 r90; Bottom Overlay "13 SCK" at 2283.7,643.12 h40 r90; Bottom Overlay "23 A9" at 1283.7,609.8 h40 r90; Bottom Overlay "19 SCL" at 1683.7,643.12 h40 r90; Bottom Overlay "16 A2" at 1983.7,603.13 h40 r90; Bottom Overlay "Vin" at 983.7,523.16 h40 r90; Bottom Overlay "3.3V" at 1183.7,563.14 h40 r90; Bottom Overlay "AGND" at 1083.7,569.81 h40 r90; Bottom Overlay "21 A7" at 1483.7,603.13 h40 r90; Bottom Overlay "17 A3" at 1883.7,603.13 h40 r90; Bottom Overlay "14 A0" at 2183.7,603.13 h40 r90; Bottom Overlay "15 A1" at 2083.7,589.8 h40 r90
BRD2: Top Overlay "3.3V" at -1164.13,1737.64 h30 r90; Top Overlay "EN" at -1264.13,1742.64 h30 r90; Top Overlay "VBAT" at -1364.13,1737.64 h30 r90; Top Overlay "FIX" at -1464.13,1737.64 h30 r90; Top Overlay "TX" at -1564.13,1737.64 h30 r90; Top Overlay "RX" at -1664.13,1742.64 h30 r90; Top Overlay "GND" at -1764.13,1737.64 h30 r90; Top Overlay "Vin" at -1864.13,1737.64 h30 r90; Top Overlay "PPS" at -1964.13,1737.64 h30 r90; Bottom Overlay "PPS" at -1964.13,1812.61 h30 r90; Bottom Overlay "RX" at -1664.13,1782.62 h30 r90; Bottom Overlay "TX" at -1564.13,1782.62 h30 r90; Bottom Overlay "EN" at -1264.13,1782.62 h30 r90; Bottom Overlay "3.3V" at -1164.13,1837.6 h30 r90; Bottom Overlay "Vin" at -1864.13,1807.61 h30 r90; Bottom Overlay "GND" at -1764.13,1812.61 h30 r90; Bottom Overlay "FIX" at -1464.13,1807.61 h30 r90; Bottom Overlay "VBAT" at -1364.13,1842.6 h30 r90
BRD3: Top Overlay "PS0" at -1562.01,309.84 h40 r90; Top Overlay "PS1" at -1462.01,317.72 h40 r90; Top Overlay "ADR" at -1260.04,309.84 h40 r90; Top Overlay "INT" at -1362.01,317.72 h40 r90; Top Overlay "3Vo" at -1562.01,-632.28 h40 r90; Top Overlay "Vin" at -1662.01,-632.28 h40 r90; Top Overlay "GND" at -1462.01,-632.28 h40 r90; Top Overlay "SDA" at -1362.01,-632.28 h40 r90; Top Overlay "SCL" at -1262.01,-632.28 h40 r90; Top Overlay "RST" at -1162.01,-632.28 h40 r90; Top Overlay "BNO055 Board" at -1687.01,-382.28 h40; Bottom Overlay "PS0" at -1562.01,417.72 h40 r90; Bottom Overlay "PS1" at -1462.01,417.72 h40 r90; Bottom Overlay "ADR" at -1262.01,417.72 h40 r90; Bottom Overlay "INT" at -1362.01,417.72 h40 r90; Bottom Overlay "3Vo" at -1562.01,-532.28 h40 r90; Bottom Overlay "Vin" at -1662.01,-532.28 h40 r90; Bottom Overlay "GND" at -1462.01,-532.28 h40 r90; Bottom Overlay "SDA" at -1362.01,-532.28 h40 r90; Bottom Overlay "SCL" at -1262.01,-532.28 h40 r90; Bottom Overlay "RST" at -1162.01,-532.28 h40 r90; Bottom Overlay "BNO055 Board" at -1187.01,-382.28 h40
BRD4: Top Overlay "SCL" at -2326.18,-682.17 h40 r90; Top Overlay "SDA" at -2426.18,-682.17 h40 r90; Top Overlay "3.3V" at -2526.18,-707.17 h40 r90; Top Overlay "GND" at -2626.18,-682.17 h40 r90; Top Overlay "HMC6343" at -2101.18,-307.17 h40 r90; Bottom Overlay "GND" at -2626.18,-347.17 h40 r90; Bottom Overlay "SCL" at -2331.18,-347.17 h40 r90; Bottom Overlay "3.3V" at -2526.18,-307.17 h40 r90; Bottom Overlay "SDA" at -2426.18,-347.17 h40 r90
BRD5: Top Overlay "RFduino" at -1037.4,-1551.57 h40 r90; Top Overlay "GPIO6" at -1412.4,-901.57 h40 r90; Top Overlay "GPIO5" at -1312.4,-901.57 h40 r90; Top Overlay "GPIO4" at -1212.4,-901.57 h40 r90; Top Overlay "GPI03" at -1112.4,-901.57 h40 r90; Top Overlay "GPIO2" at -1012.4,-901.57 h40 r90; Top Overlay "GPIO1" at -1012.4,-2026.57 h40 r90; Top Overlay "RESET" at -1312.4,-2026.57 h40 r90; Top Overlay "GPIO0" at -1112.4,-2026.57 h40 r90; Top Overlay "+3.3V" at -1412.4,-2026.57 h40 r90; Top Overlay "GND" at -1612.4,-1951.57 h40 r90; Bottom Overlay "GPIO6" at -1412.4,-1046.63 h40 r90; Bottom Overlay "GPIO2" at -1012.4,-1046.63 h40 r90; Bottom Overlay "GPI03" at -1112.4,-1046.63 h40 r90; Bottom Overlay "GPIO5" at -1312.4,-1046.63 h40 r90; Bottom Overlay "GPIO4" at -1212.4,-1046.63 h40 r90; Bottom Overlay "+3.3V" at -1412.4,-1546.63 h40 r90; Bottom Overlay "GPIO1" at -1012.4,-1559.96 h40 r90; Bottom Overlay "GPIO0" at -1112.4,-1546.63 h40 r90; Bottom Overlay "GND" at -1612.4,-1619.94 h40 r90; Bottom Overlay "RESET" at -1312.4,-1539.97 h40 r90
BRD6: Top Overlay "GND" at 1622.44,1851.14 h30; Top Overlay "GPIO2" at 1617.44,1751.14 h30; Top Overlay "GPIO0" at 1617.44,1651.14 h30; Top Overlay "RX" at 1617.44,1551.14 h30; Top Overlay "3.3V" at 1317.44,1551.14 h30; Top Overlay "RST" at 1342.43,1651.14 h30; Top Overlay "EN" at 1372.42,1751.14 h30; Top Overlay "TX" at 1372.42,1846.14 h30; Bottom Overlay "GPIO2" at 1752.4,1751.14 h30; Bottom Overlay "GPIO0" at 1752.4,1651.14 h30; Bottom Overlay "GND" at 1697.42,1851.14 h30; Bottom Overlay "RX" at 1667.42,1551.14 h30; Bottom Overlay "TX" at 1422.41,1846.14 h30; Bottom Overlay "EN" at 1422.41,1751.14 h30; Bottom Overlay "RST" at 1422.41,1651.14 h30; Bottom Overlay "3.3V" at 1422.41,1551.14 h30
C2: Top Overlay "-" at 2198.15,-842.48 h40 r90; Top Overlay "+" at 2198.15,-1297.48 h40 r90; Bottom Overlay "+" at 2198.15,-1237.48 h40 r90; Bottom Overlay "-" at 2198.15,-917.48 h40 r90
C3: Top Overlay "-" at 2661.73,-852.32 h40 r90; Top Overlay "+" at 2661.73,-1307.32 h40 r90; Bottom Overlay "+" at 2661.73,-1247.32 h40 r90; Bottom Overlay "-" at 2661.73,-927.32 h40 r90
C6: Top Overlay "-" at 2178.46,-1425.16 h40 r90; Top Overlay "+" at 2178.46,-1880.16 h40 r90; Bottom Overlay "+" at 2178.46,-1820.16 h40 r90; Bottom Overlay "-" at 2178.46,-1500.16 h40 r90
DISP: Top Overlay "SparkFun  LCD" at -585.63,-1201.77 h60 r90; Top Overlay "GND" at 45.04,-1307.68 h40 r90; Top Overlay "RX" at 145.04,-1297.68 h40 r90; Top Overlay "Vcc" at -69.96,-1302.68 h40 r90
J1: Top Overlay "1" at 1079.02,-1921.34 h60; Top Overlay "3" at 1079.02,-1431.34 h60; Top Overlay "4" at 889.02,-1431.34 h60; Top Overlay "2" at 889.02,-1921.34 h60
J2: Top Overlay "1" at -2382.6,-1330.79 h60; Top Overlay "3" at -2382.6,-840.79 h60; Top Overlay "4" at -2572.6,-840.79 h60; Top Overlay "2" at -2572.6,-1330.79 h60
U2: Top Overlay "GND" at 1632.72,-1497.2 h40; Top Overlay "5V" at 1768.72,-1474.2 h40; Top Overlay "TAB" at 1622.72,-1275.2 h40; Top Overlay "Vin" at 1486.72,-1473.2 h40
U3: Top Overlay "GND" at 964.42,838.43 h40; Top Overlay "3.3V" at 1100.42,861.43 h40; Top Overlay "TAB" at 954.42,1060.43 h40; Top Overlay "5V" at 855.32,864.17 h40